# Altium PCB PCB3.PcbDoc
Units mil, origin at the board's own origin, x right, y up, seen from the top; angles counter-clockwise.
Board outline 6000 x 4000 mil, 2 copper layers (Top Layer, Bottom Layer); 1 components, 18 nets, 32 pads, 0 vias.
Unrouted connection lines stored in the file: 2.
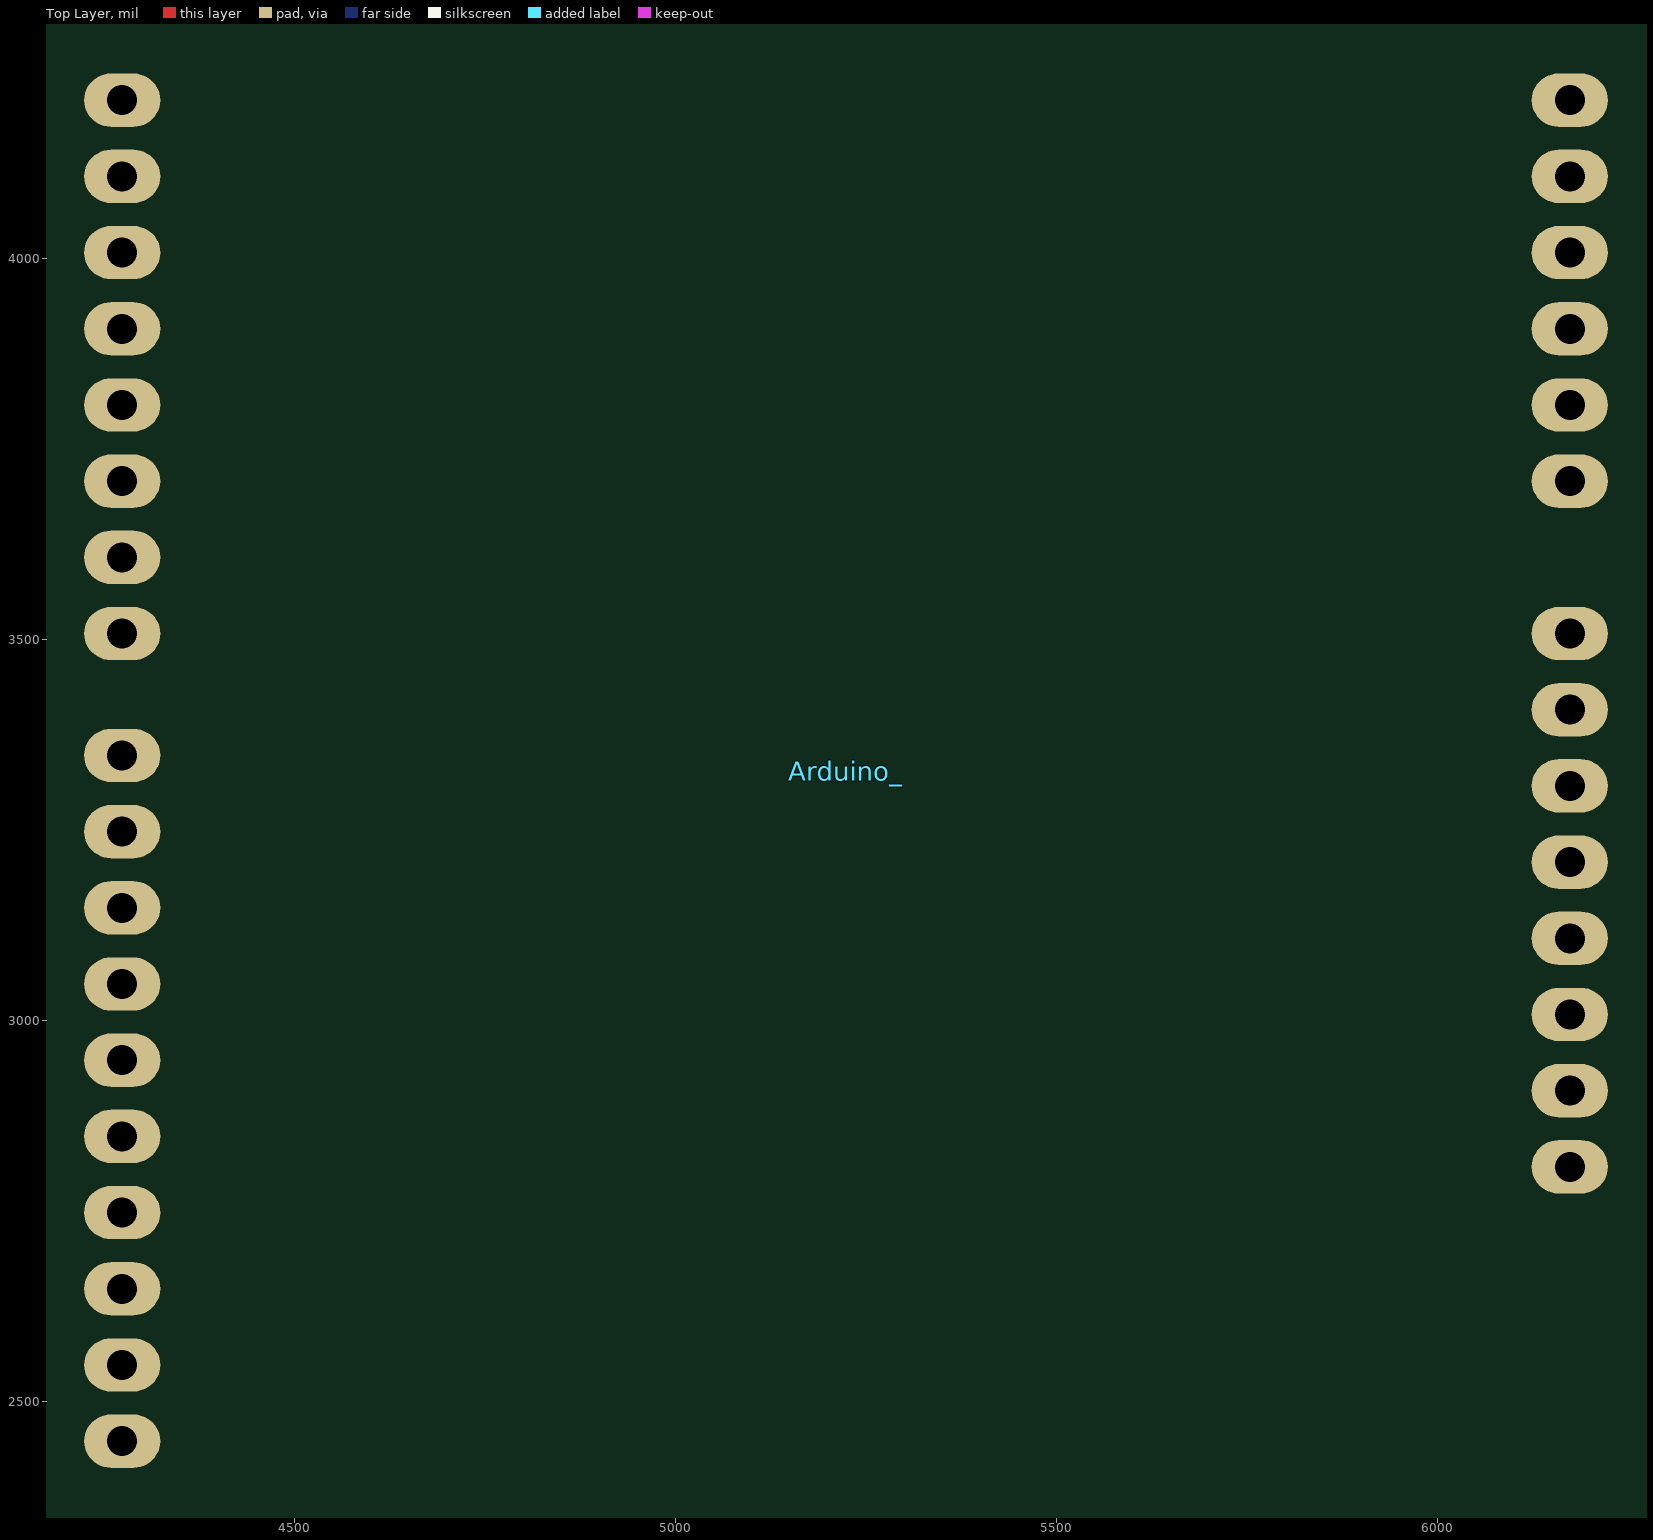
[diagram p0: Top Layer view]
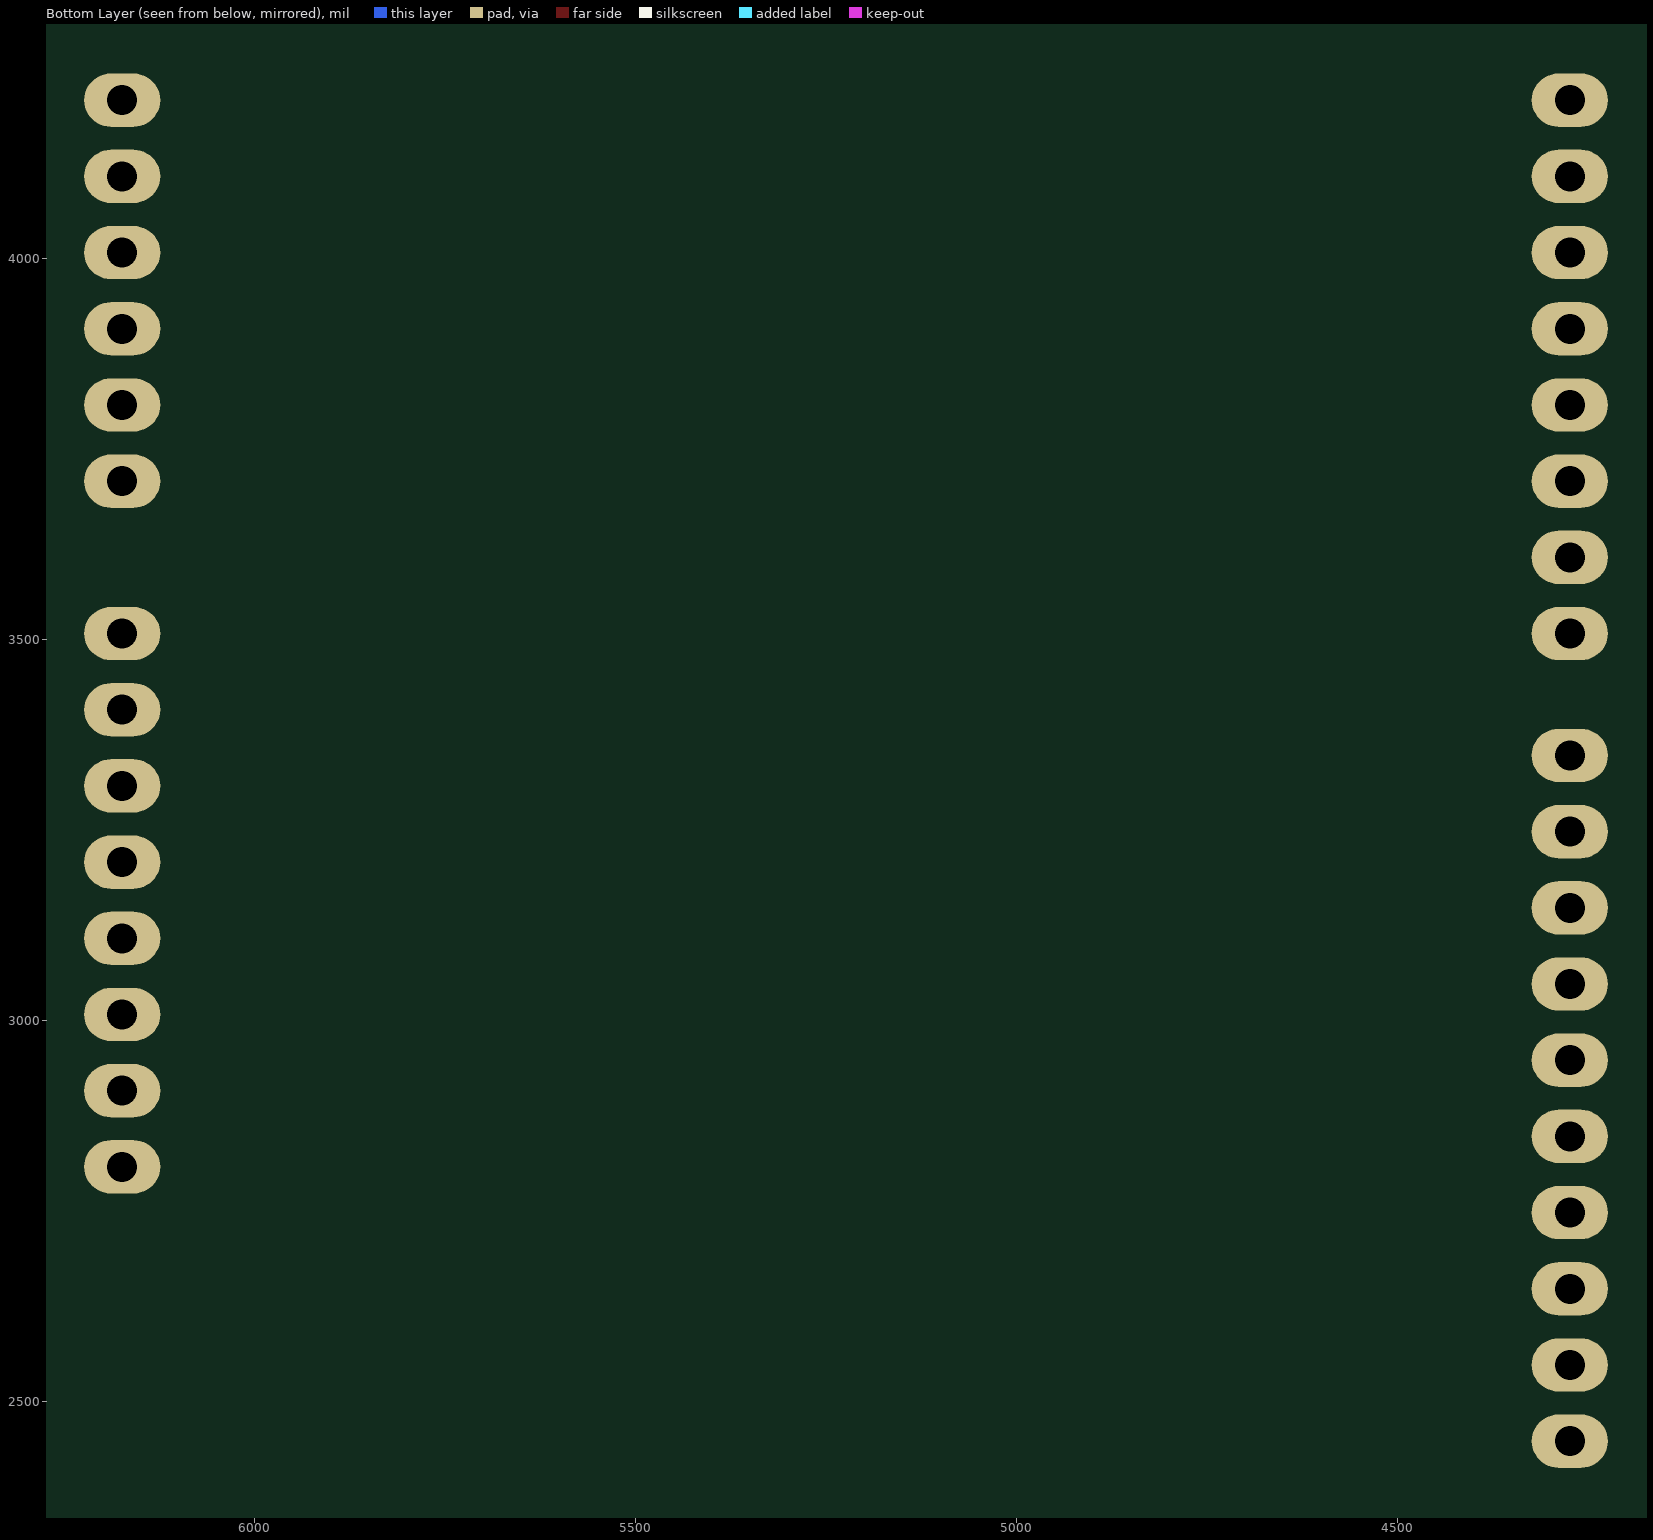
[diagram p1: Bottom Layer view, seen from below]

## Layer stack, top to bottom
Top Solder: solder mask 0.4, Solder Resist, Dk 3.5
Top Layer: signal copper 1.4
Dielectric 1: dielectric 12.6, FR-4, Dk 4.8
Bottom Layer: signal copper 1.4
Bottom Solder: solder mask 0.4, Solder Resist, Dk 3.5

## Board outline
1000,1000 7000,1000 7000,5000 1000,5000

## Design rules (kind name [scope] priority, off if disabled: settings)
Clearance [All] p1: gap=10 ignorepadtopadclearanceinfootprint=FALSE
PolygonConnect [All] p1: connectstyle=Relief reliefconductorwidth=10 reliefentries=4 polygonreliefangle="90 Angle" airgapwidth=10
RoutingVias [All] p1: holewidth=28 width=50 viastyle="Through Hole" minholewidth=28 minwidth=50 maxholewidth=28 maxwidth=50
SolderMaskExpansion [All] p1: expansion=4 istentingtop=FALSE
SupplyNets "Schematic Supply Nets" [InNet('GND')] p1: voltage=0.000
Width [All] p1: maxlimit=10 minlimit=10 preferedwidth=10
30 further rules are at their usual default settings.

## Components (designator, comment, footprint, x,y, rotation, side; value= is the part's Value field where it differs from the comment)
Arduino_ "arduino shield_uno_rev3_with_holes" "ARDUINO UNO SHIELD WITH 3D MODEL" 6273.73,1707.46 r90 top

## Footprints (in the part's own frame and the unit in brackets; to place one, negate y for a bottom-side part, rotate by r counter-clockwise, add the part's x,y. Pads: shape width x height; smd on the part's side, far side on the other; paste and mask are expansions set on the pad)
"ARDUINO UNO SHIELD WITH 3D MODEL" [mil]
  oval 70x100 hole 39.37: 1(1300,100) 2(1400,100) 3(1500,100) 4(1600,100) 5(1700,100) 6(1800,100) 7(2000,100) 8(2100,100) 9(2200,100) 10(2300,100) 11(2400,100) 12(2500,100) 13(2500,2000) 14(2400,2000) 15(2300,2000) 16(2200,2000) 17(2100,2000) 18(2000,2000) 19(1900,2000) 20(1800,2000) 21(1640,2000) 22(1540,2000) 23(1440,2000) 24(1340,2000) 25(1240,2000) 26(1140,2000) 27(1040,2000) 28(940,2000) 29(840,2000) 30(740,2000) 31(1200,100) 32(1100,100)
  body extent -250,0 2700,2100, height 57

## Nets (pads, with @x,y where several pads share a name; then routed paths per layer and width w, separated by ;. In a path a pad name is that pad's centre, name@x,y a point inside that pad or via, vN(x,y) a via of type N, cw(c..) or ccw(c..) an arc to the next point about the centre after c; other vN are vias at no path point)
GND: Arduino_.4 Arduino_.5 Arduino_.27
"NetAir AC_1": 
"NetAir SSR_3": Arduino_.20
NetArduino__3: Arduino_.3
NetArduino__12: Arduino_.12
NetArduino__15: Arduino_.15
NetArduino__16: Arduino_.16
NetArduino__17: Arduino_.17
NetArduino__21: Arduino_.21
NetArduino__22: Arduino_.22
NetArduino__24: Arduino_.24
NetArduino__26: Arduino_.26
"NetDC Low_1": 
"NetDC Low_2": 
NetLabel2_1: 
"NetOC CNY17_1": 
NetRV2_1: 
NetRV2_2: 
pads on no net: Arduino_.1 Arduino_.2 Arduino_.6 Arduino_.7 Arduino_.8 Arduino_.9 Arduino_.10 Arduino_.11 Arduino_.13 Arduino_.14 Arduino_.18 Arduino_.19 Arduino_.23 Arduino_.25 Arduino_.28 Arduino_.29 Arduino_.30 Arduino_.31 Arduino_.32